# EAGLE board Frantic Maimu-Kup (1) (EAGLE 9.7.0)

Size 107.14 x 54.6 mm. Coordinates in mm from the lower left corner, seen from the top.
Outline: 0,0 107.14,0 107.14,54.6 0,54.6 0,0
Copper layers (1*16): Top 0.035mm / dielectric 1.5mm / Bottom 0.035mm
Design rules "default": minimum track width 6mil, minimum drill 0.35mm, track to track 6mil, track to pad 6mil, pad to pad 6mil, via to via 6mil, smd to smd 6mil, copper to edge 40mil, drill to drill 6mil, minimum pad ring 10mil, minimum via ring 8mil, stop-mask expansion 4mil, vias tented up to drill 0mil, thermal gap 10mil

## Footprints (pad centres in the part's own frame; a part is rotated, then mirrored left to right if it is on the bottom)
MIC127-140-A01 = smd 0.8 x 2.502: P$1 24.765,2.54; P$2 23.495,2.54; P$3 22.225,2.54; P$4 20.955,2.54; P$5 19.685,2.54; P$6 18.415,2.54; P$7 17.145,2.54; P$8 15.875,2.54; P$9 14.605,2.54; P$10 13.335,2.54; P$11 12.065,2.54; P$12 10.795,2.54; P$13 9.525,2.54; P$14 8.255,2.54; P$15 6.985,2.54; P$16 5.715,2.54; P$17 4.445,2.54; P$18 3.175,2.54; P$19 1.905,2.54; P$20 0.635,2.54; P$21 -0.635,2.54; P$22 -1.905,2.54; P$23 -3.175,2.54; P$24 -4.445,2.54; P$25 -5.715,2.54; P$26 -6.985,2.54; P$27 -8.255,2.54; P$28 -9.525,2.54; P$29 -10.795,2.54; P$30 -12.065,2.54; P$31 -13.335,2.54; P$32 -14.605,2.54; P$33 -15.875,2.54; P$34 -17.145,2.54; P$35 -18.415,2.54; P$36 -19.685,2.54; P$37 -20.955,2.54; P$38 -22.225,2.54; P$39 -23.495,2.54; P$40 -24.765,2.54 | drill 1.1 pad 2.3: P$41 26.899,-1.168; P$42 -26.899,-1.168
PIEZO = drill 1 pad 1.6: 1 -3.5,0; 2 3.5,0
28027 = drill 1.016 long: 1 -2.54,0; 2 0,0; 3 2.54,0

## Placement (x,y rotation side)
MB1  MICRO:BIT_MIC127  [MIC127-140-A01]  75.56,43.81 180 top
PIEZO1  PIEZO  [PIEZO]  69.22,13.58 180 top
PIR2  PIR-SENSOR_28027  [28027]  20.95,41.52 0 top

## Library data of the parts
MB1 PIEZO1 PIR2 = Tinkercad

## Nets
MB1_3.3V: MB1.P$27 MB1.P$28 MB1.P$29 MB1.P$30 MB1.P$31 MB1.P$32 PIR2.2
MB1_GND: MB1.P$35 MB1.P$36 MB1.P$37 MB1.P$38 MB1.P$39 MB1.P$40 PIEZO1.2 PIR2.3
MB1_P0: MB1.P$2 MB1.P$3 MB1.P$4 MB1.P$5 PIR2.1
MB1_P2: MB1.P$19 MB1.P$20 MB1.P$21 MB1.P$22 PIEZO1.1

## Tracks (layer width: path | path; a pad name or v marks a point on that pad's centre or on a via)
MB1_3.3V  (6 unrouted)
MB1_GND  (7 unrouted)
MB1_P0  (4 unrouted)
MB1_P2  (4 unrouted)